# Altium PCB LPCB219R0.PcbDoc (part 2 of 2)
Units mm, origin at the board's own origin, x right, y up, seen from the top; angles counter-clockwise.
Board outline 146 x 183.7 mm, 2 copper layers (Top Layer, Bottom Layer); 93 components, 73 nets, 356 pads, 119 vias.
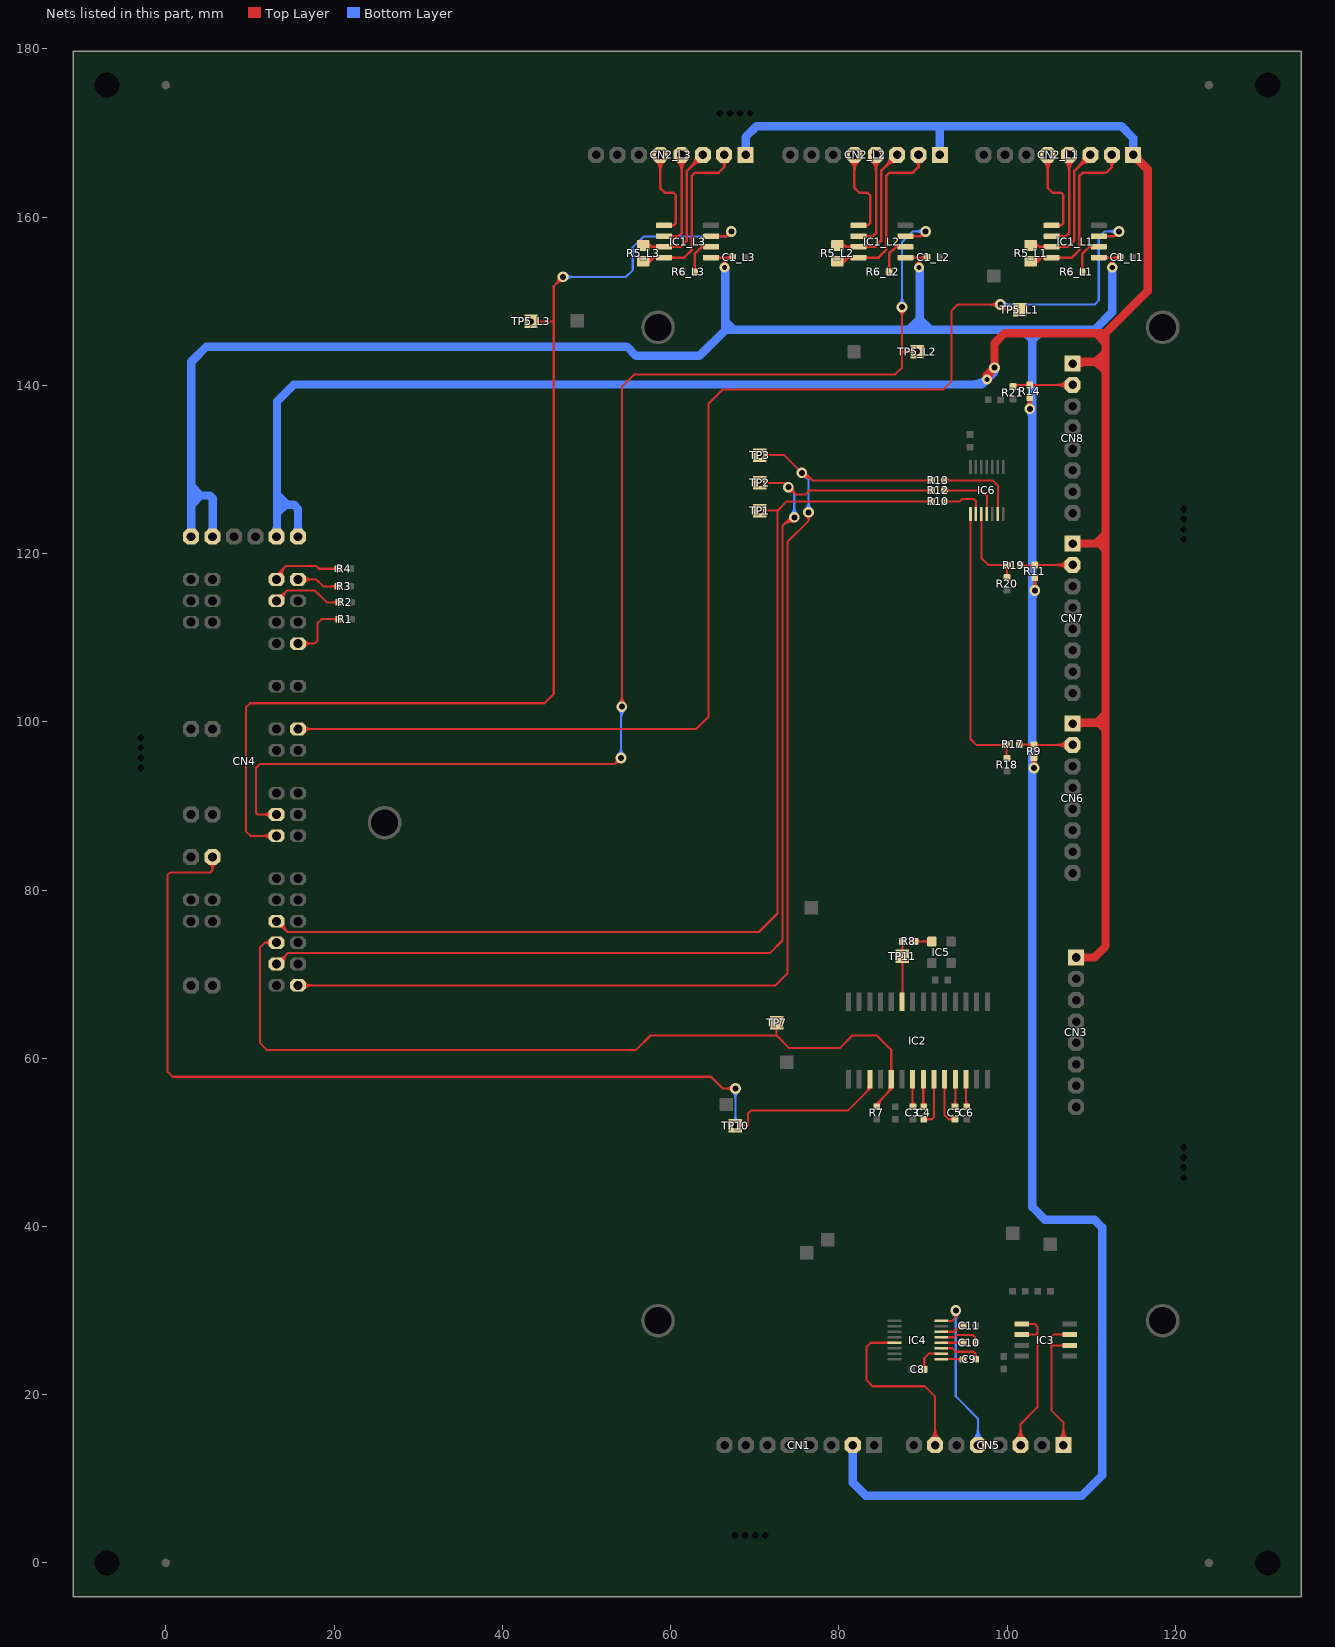
[diagram p2: the nets of this part, all layers, seen from the top]

## Via types
v1: diameter 1.27, hole 0.711, Top Layer to Bottom Layer, 68 vias
v2: diameter 1.2, hole 0.6, Top Layer to Bottom Layer, 51 vias

## Nets (pads, with @x,y where several pads share a name; then routed paths per layer and width w, separated by ;. In a path a pad name is that pad's centre, name@x,y a point inside that pad or via, vN(x,y) a via of type N, cw(c..) or ccw(c..) an arc to the next point about the centre after c; other vN are vias at no path point) (continued)
LASER_SPI_SCK: CN4.T13 IC2.17 TP10.1 | length 135.9
  Top Layer w0.254: CN4.T13@5.076,83.217 cw(c4.479,82.34) 5.54,82.34 ; CN4.T13@5.219,83.427 cw(c4.805,82.82) 5.54,82.82 cw(c6.275,82.82) CN4.T13@5.861,83.427 ; CN4.T13@5.54,83.9 5.54,82.34 ; CN4.T13@6.004,83.217 ccw(c6.601,82.34) 5.54,82.34 ; v1@67.341,56.041 ccw(c66.474,55.174) 66.474,56.4 ccw(c66.474,57.626) v1@67.341,56.759 ; v1(67.7,52) 69.2,52 69.2,53.4 69.6,53.8 81.1,53.8 83.685,56.385 ; v1(67.7,56.4) 66.2,56.4 64.8,57.8 0.8,57.8 0.2,58.4 0.2,81.8 0.5,82.1 5.3,82.1 5.54,82.34 ; TP10.1@68.059,51.641 cw(c68.926,50.774) 68.926,52 cw(c68.926,53.226) TP10.1@68.059,52.359 ; 83.174,55.874 ccw(c82.358,56.69) IC2.17@83.512,56.69 ; IC2.17@83.596,56.542 cw(c83.503,56.385) 83.685,56.385 ; 83.608,56.308 ccw(c83.225,56.69) IC2.17@83.766,56.69 ; IC2.17@83.685,57.49 83.685,56.385 ; IC2.17@83.774,56.542 ccw(c83.867,56.385) 83.685,56.385
  Bottom Layer w0.254: v1@67.341,52.359 ccw(c66.474,53.226) 67.7,53.226 ccw(c68.926,53.226) v1@68.059,52.359 ; v1@67.341,56.041 cw(c66.474,55.174) 67.7,55.174 cw(c68.926,55.174) v1@68.059,56.041 ; v1(67.7,52) v1(67.7,56.4)
LASER_TX1: CN4.T1 IC1_L1.3 TP5_L1.1 | length 169.5
  Top Layer w0.254: CN4.T1@15.7,99.14 63.04,99.14 64.5,100.6 64.5,137.8 66.2,139.5 92.4,139.5 93.4,140.5 93.4,148.9 94.1,149.6 v1(99.2,149.6) 99.8,149 TP5_L1.1@101.5,149 ; CN4.T1@16.163,98.879 cw(c16.793,98.249) 16.793,99.14 cw(c16.793,100.031) CN4.T1@16.163,99.401 ; CN4.T1@16.343,98.699 cw(c17.407,97.636) 17.407,99.14 cw(c17.407,100.644) CN4.T1@16.343,99.581 ; v1@98.841,149.241 ccw(c97.974,148.374) 97.974,149.6 ccw(c97.974,150.826) v1@98.841,149.959
  Top Layer w0.3: IC1_L1.3@110.9,157.735 112.735,157.735 ; IC1_L1.3@111.649,157.611 cw(c111.947,157.312) 111.947,157.735 cw(c111.947,158.158) IC1_L1.3@111.649,157.859 ; v1@112.837,158.154 cw(c112.441,158.029) 112.735,157.735 ; v1@113.154,157.837 ccw(c113.029,157.441) 112.735,157.735 ; v1(113.3,158.3) 112.735,157.735
  Bottom Layer w0.254: v1(99.2,149.6) 110.4,149.6 110.9,150.1 110.9,157.6 111.6,158.3 v1(113.3,158.3) ; v1@99.559,149.241 cw(c100.426,148.374) 100.426,149.6 cw(c100.426,150.826) v1@99.559,149.959 ; v1@112.941,157.941 ccw(c112.074,157.074) 112.074,158.3 ccw(c112.074,159.526) v1@112.941,158.659
LASER_TX2: CN4.T8 IC1_L2.3 TP5_L2.1 | length 171.9
  Top Layer w0.254: CN4.T8@12.517,88.539 ccw(c11.453,87.476) 11.453,88.98 ccw(c11.453,90.484) CN4.T8@12.517,89.421 ; CN4.T8@12.697,88.719 ccw(c12.067,88.089) 12.067,88.98 ccw(c12.067,89.871) CN4.T8@12.697,89.241 ; CN4.T8@13.16,88.98 10.92,88.98 10.7,89.2 10.7,94.5 11.2,95 53.4,95 ; v1@53.599,95.618 cw(c52.898,95.502) 53.4,95 ; v1@53.841,102.159 ccw(c52.974,103.026) 54.2,103.026 ccw(c55.426,103.026) v1@54.559,102.159 ; v1@54.018,95.199 ccw(c53.902,94.498) 53.4,95 ; v1(54.1,95.7) 53.4,95 ; v1(54.2,101.8) 54.2,139.8 55.7,141.3 86.7,141.3 87.5,142.1 87.5,143.9 ; v1@87.141,148.941 cw(c86.274,148.074) 87.5,148.074 cw(c88.726,148.074) v1@87.859,148.941 ; v1(87.5,149.3) 87.5,143.9 ; v1(89.3,144) 87.6,144 87.5,143.9
  Top Layer w0.3: IC1_L2.3@87.921,157.735 89.756,157.735 ; IC1_L2.3@88.669,157.611 cw(c88.968,157.312) 88.968,157.735 cw(c88.968,158.158) IC1_L2.3@88.669,157.859 ; v1@89.858,158.154 cw(c89.462,158.029) 89.756,157.735 ; v1@90.175,157.837 ccw(c90.05,157.441) 89.756,157.735 ; v1(90.321,158.3) 89.756,157.735
  Bottom Layer w0.254: v1@53.741,96.059 ccw(c52.874,96.926) 54.1,96.926 ccw(c55.326,96.926) v1@54.459,96.059 ; v1@53.841,101.441 cw(c53.215,100.815) 54.1,100.815 ; v1(54.1,95.7) 54.1,101.7 v1(54.2,101.8) ; 54.1,100.332 cw(c55.668,100.332) v1@54.559,101.441 ; 54.1,100.945 cw(c55.055,100.945) v1@54.38,101.62 ; v1@87.141,149.659 ccw(c86.274,150.526) 87.5,150.526 ccw(c88.726,150.526) v1@87.859,149.659 ; v1(87.5,149.3) 87.5,157 88.8,158.3 v1(90.321,158.3) ; v1@89.961,157.941 ccw(c89.094,157.074) 89.094,158.3 ccw(c89.094,159.526) v1@89.961,158.659
LASER_TX3: CN4.T10 IC1_L3.3 TP5_L3.1 | length 144.3
  Top Layer w0.254: CN4.T10@12.517,85.999 ccw(c11.453,84.936) 11.453,86.44 ccw(c11.453,87.944) CN4.T10@12.517,86.881 ; CN4.T10@12.697,86.179 ccw(c12.067,85.549) 12.067,86.44 ccw(c12.067,87.331) CN4.T10@12.697,86.701 ; CN4.T10@13.16,86.44 10.06,86.44 9.5,87 9.5,101.7 10,102.2 45,102.2 46.1,103.3 46.1,147.6 ; v1(43.4,147.6) 46.1,147.6 ; v1@46.692,152.9 cw(c45.466,152.9) 46.333,152.033 cw(c47.2,151.166) v1@47.2,152.392 ; v1(47.2,152.9) 46.1,151.8 46.1,147.6
  Top Layer w0.3: IC1_L3.3@64.821,157.735 66.656,157.735 ; IC1_L3.3@65.569,157.611 cw(c65.868,157.312) 65.868,157.735 cw(c65.868,158.158) IC1_L3.3@65.569,157.859 ; v1@66.758,158.154 cw(c66.362,158.029) 66.656,157.735 ; v1@67.075,157.837 ccw(c66.95,157.441) 66.656,157.735 ; v1(67.221,158.3) 66.656,157.735
  Bottom Layer w0.254: v1(47.2,152.9) 54.7,152.9 55.5,153.7 55.5,156.4 56.8,157.7 66.621,157.7 v1(67.221,158.3) ; v1@47.559,152.541 cw(c48.426,151.674) 48.426,152.9 cw(c48.426,154.126) v1@47.559,153.259
MID_SIG_Q2: IC6.3 R19.2 R20.2 | length 10.2
  Top Layer w0.254: IC6.3@96.95,124.725 96.95,119.45 97.75,118.65 100,118.65 R19.2@100.05,118.6 100,118.55 R20.2@100,117.15
NetC3_2: C3.2 IC2.21 | length 5
  Top Layer w0.254: C3.2@88.607,54.433 ccw(c88.225,54.815) 88.765,54.815 ; IC2.21@88.643,56.568 cw(c88.347,56.272) 88.765,56.272 cw(c89.183,56.272) IC2.21@88.887,56.568 ; 88.765,54.984 ccw(c89.544,54.984) C3.2@88.993,54.433 ; IC2.21@88.765,57.49 88.765,54.275 C3.2@88.8,54.24
NetC4_1: C4.1 IC2.23 | length 7.5
  Top Layer w0.254: C4.1@90.1,52.74 91.05,52.74 91.305,52.995 IC2.23@91.305,57.49 ; C4.1@90.293,52.547 cw(c90.759,52.081) 90.759,52.74 cw(c90.759,53.399) C4.1@90.293,52.933 ; IC2.23@91.183,56.568 cw(c90.887,56.272) 91.305,56.272 cw(c91.723,56.272) IC2.23@91.427,56.568
NetC4_2: C4.2 IC2.22 | length 5
  Top Layer w0.254: C4.2@89.907,54.433 ccw(c89.598,54.742) 90.035,54.742 ; IC2.22@89.913,56.568 cw(c89.617,56.272) 90.035,56.272 cw(c90.453,56.272) IC2.22@90.157,56.568 ; 90.035,55.056 ccw(c90.916,55.056) C4.2@90.293,54.433 ; IC2.22@90.035,57.49 90.035,54.305 C4.2@90.1,54.24
NetC5_1: C5.1 IC2.25 | length 5
  Top Layer w0.254: C5.1@93.607,54.433 ccw(c93.032,55.008) 93.845,55.008 ; IC2.25@93.723,56.568 cw(c93.427,56.272) 93.845,56.272 cw(c94.263,56.272) IC2.25@93.967,56.568 ; C5.1@93.8,54.24 93.845,54.285 IC2.25@93.845,57.49 ; 93.845,54.79 ccw(c94.35,54.79) C5.1@93.993,54.433
NetC5_2: C5.2 IC2.24 | length 7.4
  Top Layer w0.254: IC2.24@92.453,56.568 cw(c92.157,56.272) 92.575,56.272 cw(c92.993,56.272) IC2.24@92.697,56.568 ; IC2.24@92.575,57.49 92.575,53.215 93.05,52.74 C5.2@93.8,52.74 ; C5.2@93.607,52.547 ccw(c93.141,52.081) 93.141,52.74 ccw(c93.141,53.399) C5.2@93.607,52.933
NetC6_1: C6.1 IC2.26 | length 5
  Top Layer w0.254: IC2.26@94.993,56.568 cw(c94.697,56.272) 95.115,56.272 cw(c95.533,56.272) IC2.26@95.237,56.568 ; C6.1@95.007,54.433 ccw(c94.746,54.694) 95.115,54.694 ; 95.115,55.104 ccw(c96.064,55.104) C6.1@95.393,54.433 ; IC2.26@95.115,57.49 95.115,54.325 C6.1@95.2,54.24
NetC8_2: C8.2 IC4.2 | length 4.6
  Top Layer w0.254: C8.2@89.957,23.193 ccw(c89.491,23.659) 90.15,23.659 ccw(c90.809,23.659) C8.2@90.343,23.193 ; C8.2@90.15,23 90.15,24.35 90.675,24.875 IC4.2@92.175,24.875
NetC9_1: C9.1 IC4.1 | length 3.6
  Top Layer w0.254: IC4.1@92.175,24.225 94.725,24.225 C9.1@94.75,24.2 ; 94.031,24.225 cw(c94.031,23.481) C9.1@94.557,24.007 ; 94.151,24.225 ccw(c94.151,24.799) C9.1@94.557,24.393
NetC9_2: C9.2 IC4.3 | length 6
  Top Layer w0.254: IC4.3@92.175,25.525 93.475,25.525 93.9,25.1 96,25.1 96.25,24.85 ; C9.2@96.059,24.395 ccw(c95.613,24.85) 96.25,24.85 ; C9.2@96.25,24.2 96.25,24.85 ; C9.2@96.441,24.395 cw(c96.887,24.85) 96.25,24.85
NetC10_1: C10.1 IC4.4 | length 3.6
  Top Layer w0.254: IC4.4@92.175,26.175 94.725,26.175 C10.1@94.75,26.2 ; 94.031,26.175 ccw(c94.031,26.919) C10.1@94.557,26.393 ; 94.151,26.175 cw(c94.151,25.601) C10.1@94.557,26.007
NetC10_2: C10.2 IC4.5 | length 5.7
  Top Layer w0.254: IC4.5@92.175,26.825 93.725,26.825 94,27.1 95.9,27.1 96.25,26.75 ; C10.2@96.085,26.417 ccw(c95.833,26.75) 96.25,26.75 ; C10.2@96.25,26.2 96.25,26.75 ; C10.2@96.415,26.417 cw(c96.667,26.75) 96.25,26.75
NetC11_1: C11.1 IC4.6 | length 4.8
  Top Layer w0.254: IC4.6@92.175,27.475 93.675,27.475 94.4,28.2 C11.1@94.75,28.2 ; 93.686,27.486 cw(c94.75,26.423) C11.1@94.75,27.927 ; 94.12,27.92 cw(c94.75,27.29) C11.1@94.75,28.181
NetCN2_L1_2: CN2_L1.2 IC1_L1.8 R5_L1.1 | length 27.5
  Top Layer w0.3: R5_L1.1@102.8,154.75 103.65,154.75 ; R5_L1.1@102.838,154.671 ccw(c103.202,155.133) 103.617,154.717 ; R5_L1.1@103.024,154.907 ccw(c103.412,155.4) 103.856,154.956 ; R5_L1.1@103.209,155.143 ccw(c103.623,155.667) 104.095,155.195 ; R5_L1.1@103.362,154.558 cw(c103.65,154.438) 103.65,154.75 ; R5_L1.1@103.362,154.942 ccw(c103.65,155.062) 103.65,154.75 ; IC1_L1.8@104.551,155.071 ccw(c104.253,154.772) 104.253,155.195 ccw(c104.253,155.618) IC1_L1.8@104.551,155.319 ; IC1_L1.8@106.049,155.071 cw(c106.347,154.772) 106.347,155.195 cw(c106.347,155.618) IC1_L1.8@106.049,155.319 ; CN2_L1.2@112.024,166.72 cw(c111.541,165.95) 112.45,165.95 cw(c113.359,165.95) CN2_L1.2@112.876,166.72 ; CN2_L1.2@112.45,167.4 112.45,165.95 111.8,165.3 109,165.3 108.6,164.9 108.6,156.1 107.695,155.195 IC1_L1.8@105.3,155.195 104.095,155.195 ; 103.65,154.75 104.095,155.195
NetCN2_L1_3: CN2_L1.3 IC1_L1.7 R5_L1.2 | length 23.6
  Top Layer w0.3: R5_L1.2@102.8,156.65 103.65,156.65 ; R5_L1.2@103.362,156.458 cw(c103.65,156.338) 103.65,156.65 ; R5_L1.2@103.362,156.842 ccw(c103.65,156.962) 103.65,156.65 ; IC1_L1.7@104.551,156.341 ccw(c104.253,156.042) 104.253,156.465 ccw(c104.253,156.888) IC1_L1.7@104.551,156.589 ; IC1_L1.7@106.049,156.341 cw(c106.347,156.042) 106.347,156.465 cw(c106.347,156.888) IC1_L1.7@106.049,156.589 ; CN2_L1.3@109.108,167.4 cw(c107.17,167.4) 108.54,166.03 cw(c109.91,164.66) CN2_L1.3@109.91,166.598 ; CN2_L1.3@109.408,167.4 cw(c108.194,167.4) 109.052,166.542 cw(c109.91,165.684) CN2_L1.3@109.91,166.897 ; CN2_L1.3@109.91,167.4 108,165.49 108,157.2 107.265,156.465 IC1_L1.7@105.3,156.465 103.835,156.465 103.65,156.65
NetCN2_L1_4: CN2_L1.4 IC1_L1.6 | length 17.2
  Top Layer w0.3: IC1_L1.6@105.3,157.735 107.035,157.735 107.4,158.1 107.4,167.37 CN2_L1.4@107.37,167.4 ; IC1_L1.6@106.049,157.611 cw(c106.347,157.312) 106.347,157.735 cw(c106.347,158.158) IC1_L1.6@106.049,157.859 ; CN2_L1.4@106.803,166.833 cw(c105.36,165.39) 107.4,165.39 ; CN2_L1.4@107.015,167.045 cw(c106.084,166.114) 107.4,166.114 ; 107.4,165.535 cw(c109.235,165.535) CN2_L1.4@107.937,166.833 ; 107.4,166.259 cw(c108.511,166.259) CN2_L1.4@107.725,167.045
NetCN2_L1_5: CN2_L1.5 IC1_L1.5 | length 16.6
  Top Layer w0.3: CN2_L1.5@104.263,166.833 cw(c102.893,165.463) 104.83,165.463 cw(c106.767,165.463) CN2_L1.5@105.397,166.833 ; CN2_L1.5@104.475,167.045 cw(c103.617,166.187) 104.83,166.187 cw(c106.043,166.187) CN2_L1.5@105.185,167.045 ; CN2_L1.5@104.83,167.4 104.83,163.47 105.4,162.9 106.4,162.9 106.7,162.6 106.7,159.3 106.405,159.005 IC1_L1.5@105.3,159.005 ; IC1_L1.5@106.049,158.881 cw(c106.347,158.582) 106.347,159.005 cw(c106.347,159.428) IC1_L1.5@106.049,159.129
NetCN2_L2_2: CN2_L2.2 IC1_L2.8 R5_L2.1 | length 27.5
  Top Layer w0.3: R5_L2.1@79.821,154.75 80.671,154.75 ; R5_L2.1@79.859,154.671 ccw(c80.222,155.133) 80.638,154.717 ; R5_L2.1@80.044,154.907 ccw(c80.433,155.4) 80.877,154.956 ; R5_L2.1@80.23,155.143 ccw(c80.643,155.667) 81.116,155.195 ; R5_L2.1@80.382,154.558 cw(c80.671,154.438) 80.671,154.75 ; R5_L2.1@80.382,154.942 ccw(c80.671,155.062) 80.671,154.75 ; IC1_L2.8@81.572,155.071 ccw(c81.273,154.772) 81.273,155.195 ccw(c81.273,155.618) IC1_L2.8@81.572,155.319 ; IC1_L2.8@83.069,155.071 cw(c83.368,154.772) 83.368,155.195 cw(c83.368,155.618) IC1_L2.8@83.069,155.319 ; CN2_L2.2@89.044,166.72 cw(c88.562,165.95) 89.471,165.95 cw(c90.379,165.95) CN2_L2.2@89.897,166.72 ; CN2_L2.2@89.471,167.4 89.471,165.95 88.821,165.3 86.021,165.3 85.621,164.9 85.621,156.1 84.716,155.195 IC1_L2.8@82.321,155.195 81.116,155.195 ; 80.671,154.75 81.116,155.195
NetCN2_L2_3: CN2_L2.3 IC1_L2.7 R5_L2.2 | length 23.6
  Top Layer w0.3: R5_L2.2@79.821,156.65 80.671,156.65 ; R5_L2.2@80.382,156.458 cw(c80.671,156.338) 80.671,156.65 ; R5_L2.2@80.382,156.842 ccw(c80.671,156.962) 80.671,156.65 ; IC1_L2.7@81.572,156.341 ccw(c81.273,156.042) 81.273,156.465 ccw(c81.273,156.888) IC1_L2.7@81.572,156.589 ; IC1_L2.7@83.069,156.341 cw(c83.368,156.042) 83.368,156.465 cw(c83.368,156.888) IC1_L2.7@83.069,156.589 ; CN2_L2.3@86.128,167.4 cw(c84.191,167.4) 85.561,166.03 cw(c86.931,164.66) CN2_L2.3@86.931,166.598 ; CN2_L2.3@86.428,167.4 cw(c85.215,167.4) 86.073,166.542 cw(c86.931,165.684) CN2_L2.3@86.931,166.897 ; CN2_L2.3@86.931,167.4 85.021,165.49 85.021,157.2 84.286,156.465 IC1_L2.7@82.321,156.465 80.856,156.465 80.671,156.65
NetCN2_L2_4: CN2_L2.4 IC1_L2.6 | length 17.2
  Top Layer w0.3: IC1_L2.6@82.321,157.735 84.056,157.735 84.421,158.1 84.421,167.37 CN2_L2.4@84.391,167.4 ; IC1_L2.6@83.069,157.611 cw(c83.368,157.312) 83.368,157.735 cw(c83.368,158.158) IC1_L2.6@83.069,157.859 ; CN2_L2.4@83.823,166.833 cw(c82.381,165.39) 84.421,165.39 ; CN2_L2.4@84.035,167.045 cw(c83.105,166.114) 84.421,166.114 ; 84.421,165.535 cw(c86.256,165.535) CN2_L2.4@84.958,166.833 ; 84.421,166.259 cw(c85.531,166.259) CN2_L2.4@84.746,167.045
NetCN2_L2_5: CN2_L2.5 IC1_L2.5 | length 16.6
  Top Layer w0.3: CN2_L2.5@81.283,166.833 cw(c79.913,165.463) 81.851,165.463 cw(c83.788,165.463) CN2_L2.5@82.418,166.833 ; CN2_L2.5@81.495,167.045 cw(c80.637,166.187) 81.851,166.187 cw(c83.064,166.187) CN2_L2.5@82.206,167.045 ; CN2_L2.5@81.851,167.4 81.851,163.47 82.421,162.9 83.421,162.9 83.721,162.6 83.721,159.3 83.426,159.005 IC1_L2.5@82.321,159.005 ; IC1_L2.5@83.069,158.881 cw(c83.368,158.582) 83.368,159.005 cw(c83.368,159.428) IC1_L2.5@83.069,159.129
NetCN2_L3_2: CN2_L3.2 IC1_L3.8 R5_L3.1 | length 27.5
  Top Layer w0.3: R5_L3.1@56.721,154.75 57.571,154.75 ; R5_L3.1@56.759,154.671 ccw(c57.122,155.133) 57.538,154.717 ; R5_L3.1@56.944,154.907 ccw(c57.333,155.4) 57.777,154.956 ; R5_L3.1@57.13,155.143 ccw(c57.543,155.667) 58.016,155.195 ; R5_L3.1@57.282,154.558 cw(c57.571,154.438) 57.571,154.75 ; R5_L3.1@57.282,154.942 ccw(c57.571,155.062) 57.571,154.75 ; IC1_L3.8@58.472,155.071 ccw(c58.173,154.772) 58.173,155.195 ccw(c58.173,155.618) IC1_L3.8@58.472,155.319 ; IC1_L3.8@59.969,155.071 cw(c60.268,154.772) 60.268,155.195 cw(c60.268,155.618) IC1_L3.8@59.969,155.319 ; CN2_L3.2@65.944,166.72 cw(c65.462,165.95) 66.371,165.95 cw(c67.279,165.95) CN2_L3.2@66.797,166.72 ; CN2_L3.2@66.371,167.4 66.371,165.95 65.721,165.3 62.921,165.3 62.521,164.9 62.521,156.1 61.616,155.195 IC1_L3.8@59.221,155.195 58.016,155.195 ; 57.571,154.75 58.016,155.195
NetCN2_L3_3: CN2_L3.3 IC1_L3.7 R5_L3.2 | length 23.6
  Top Layer w0.3: R5_L3.2@56.721,156.65 57.571,156.65 ; R5_L3.2@57.282,156.458 cw(c57.571,156.338) 57.571,156.65 ; R5_L3.2@57.282,156.842 ccw(c57.571,156.962) 57.571,156.65 ; IC1_L3.7@58.472,156.341 ccw(c58.173,156.042) 58.173,156.465 ccw(c58.173,156.888) IC1_L3.7@58.472,156.589 ; IC1_L3.7@59.969,156.341 cw(c60.268,156.042) 60.268,156.465 cw(c60.268,156.888) IC1_L3.7@59.969,156.589 ; CN2_L3.3@63.028,167.4 cw(c61.091,167.4) 62.461,166.03 cw(c63.831,164.66) CN2_L3.3@63.831,166.598 ; CN2_L3.3@63.328,167.4 cw(c62.115,167.4) 62.973,166.542 cw(c63.831,165.684) CN2_L3.3@63.831,166.897 ; CN2_L3.3@63.831,167.4 61.921,165.49 61.921,157.2 61.186,156.465 IC1_L3.7@59.221,156.465 57.756,156.465 57.571,156.65
NetCN2_L3_4: CN2_L3.4 IC1_L3.6 | length 17.2
  Top Layer w0.3: IC1_L3.6@59.221,157.735 60.956,157.735 61.321,158.1 61.321,167.37 CN2_L3.4@61.291,167.4 ; IC1_L3.6@59.969,157.611 cw(c60.268,157.312) 60.268,157.735 cw(c60.268,158.158) IC1_L3.6@59.969,157.859 ; CN2_L3.4@60.723,166.833 cw(c59.281,165.39) 61.321,165.39 ; CN2_L3.4@60.935,167.045 cw(c60.005,166.114) 61.321,166.114 ; 61.321,165.535 cw(c63.156,165.535) CN2_L3.4@61.858,166.833 ; 61.321,166.259 cw(c62.431,166.259) CN2_L3.4@61.646,167.045
NetCN2_L3_5: CN2_L3.5 IC1_L3.5 | length 16.6
  Top Layer w0.3: CN2_L3.5@58.183,166.833 cw(c56.813,165.463) 58.751,165.463 cw(c60.688,165.463) CN2_L3.5@59.318,166.833 ; CN2_L3.5@58.395,167.045 cw(c57.537,166.187) 58.751,166.187 cw(c59.964,166.187) CN2_L3.5@59.106,167.045 ; CN2_L3.5@58.751,167.4 58.751,163.47 59.321,162.9 60.321,162.9 60.621,162.6 60.621,159.3 60.326,159.005 IC1_L3.5@59.221,159.005 ; IC1_L3.5@59.969,158.881 cw(c60.268,158.582) 60.268,159.005 cw(c60.268,159.428) IC1_L3.5@59.969,159.129
NetCN4_ID1: CN4.ID1 R4.1 | length 14.1
  Top Layer w0.254: CN4.ID1@13.16,116.92 13.16,117.46 14.2,118.5 ; CN4.ID1@13.234,116.866 cw(c13.935,117.16) 13.398,117.698 ; CN4.ID1@13.469,116.965 cw(c14.312,117.318) 13.665,117.965 ; CN4.ID1@13.703,117.063 cw(c14.688,117.477) 13.933,118.233 ; CN4.ID1@13.937,117.161 cw(c15.065,117.635) 14.2,118.5 ; R4.1@20.257,118.007 ccw(c19.791,117.541) 19.791,118.2 ccw(c19.791,118.859) R4.1@20.257,118.393 ; R4.1@20.45,118.2 18.2,118.2 17.9,118.5 14.2,118.5
NetCN4_ID2: CN4.ID2 R3.1 | length 9.9
  Top Layer w0.254: CN4.ID2@15.7,116.92 17.88,116.92 18.7,116.1 R3.1@20.45,116.1 ; CN4.ID2@16.163,116.659 cw(c16.793,116.029) 16.793,116.92 cw(c16.793,117.811) CN4.ID2@16.163,117.181 ; CN4.ID2@16.343,116.479 cw(c17.407,115.416) 17.407,116.92 cw(c17.407,118.424) CN4.ID2@16.343,117.361 ; R3.1@20.257,115.907 ccw(c19.791,115.441) 19.791,116.1 ccw(c19.791,116.759) R3.1@20.257,116.293
NetCN4_ID3: CN4.ID3 R2.1 | length 12.2
  Top Layer w0.254: CN4.ID3@13.16,114.38 14.3,115.52 ; CN4.ID3@13.363,115.003 ccw(c13.363,116.018) 14.08,115.3 ; CN4.ID3@13.726,114.445 cw(c14.541,114.59) 13.956,115.176 ; CN4.ID3@13.976,114.489 cw(c15.126,114.694) 14.3,115.52 ; R2.1@20.357,114.007 ccw(c19.891,113.541) 19.891,114.2 ccw(c19.891,114.859) R2.1@20.357,114.393 ; R2.1@20.55,114.2 19.1,114.2 17.7,115.6 14.4,115.6 14.32,115.52 14.3,115.52
NetCN4_ID4: CN4.ID4 R1.1 | length 12.1
  Top Layer w0.254: CN4.ID4@15.7,109.3 17.7,109.3 18,109.6 18,111.7 18.5,112.2 R1.1@20.55,112.2 ; CN4.ID4@16.163,109.039 cw(c16.793,108.409) 16.793,109.3 cw(c16.793,110.191) CN4.ID4@16.163,109.561 ; CN4.ID4@16.343,108.859 cw(c17.407,107.796) 17.407,109.3 cw(c17.407,110.804) CN4.ID4@16.343,109.741 ; R1.1@20.357,112.007 ccw(c19.891,111.541) 19.891,112.2 ccw(c19.891,112.859) R1.1@20.357,112.393
NetCN4_T20: CN4.T20 R10.1 TP1.1 | length 133.9
  Top Layer w0.254: CN4.T20@13.16,76.28 14.44,75 ; CN4.T20@13.363,75.657 cw(c13.363,74.642) 14.08,75.36 ; CN4.T20@13.73,76.252 ccw(c14.826,76.168) 14.049,75.391 ; CN4.T20@13.984,76.233 ccw(c15.552,76.113) 14.44,75 ; v1(70.6,125.1) 72.7,125.1 ; R10.1@90.857,126.007 ccw(c90.391,125.541) 90.391,126.2 ccw(c90.391,126.859) R10.1@90.857,126.393 ; R10.1@91.05,126.2 73.8,126.2 72.7,125.1 ; 14.44,75 70.5,75 72.7,77.2 72.7,125.1
NetCN4_T22: CN4.T22 IC2.19 R7.1 TP7.1 | length 107.2
  Top Layer w0.254: CN4.T22@12.452,73.376 ccw(c11.74,72.862) 11.74,73.74 ; CN4.T22@12.452,74.104 cw(c11.74,74.618) 11.74,73.74 ; CN4.T22@13.16,73.74 11.74,73.74 ; TP7.1@72.6,64.2 72.6,62.7 ; 81.9,62.7 81.6,62.7 ; R7.1@84.5,54.24 84.5,54.59 86.225,56.315 ; R7.1@84.519,54.24 cw(c85.41,54.24) 84.78,54.87 ; R7.1@84.773,54.24 cw(c86.277,54.24) 85.214,55.304 ; 85.665,55.755 ccw(c84.729,56.69) IC2.19@86.052,56.69 ; 86.098,56.188 ccw(c85.596,56.69) IC2.19@86.306,56.69 ; IC2.19@86.103,58.412 ccw(c85.807,58.708) 86.225,58.708 ccw(c86.643,58.708) IC2.19@86.347,58.412 ; IC2.19@86.113,56.558 cw(c85.905,56.315) 86.225,56.315 ; IC2.19@86.337,56.558 ccw(c86.545,56.315) 86.225,56.315 ; 11.74,73.74 11.2,73.2 11.2,61.8 12,61 55.9,61 57.6,62.7 72.6,62.7 ; 72.6,62.7 74.1,61.2 80.1,61.2 81.6,62.7 ; 81.6,62.7 84.5,62.7 86.225,60.975 IC2.19@86.225,57.49 86.225,56.315
NetCN4_T24: CN4.T24 R12.1 TP2.1 | length 150.2
  Top Layer w0.254: CN4.T24@13.16,71.2 14.46,72.5 ; CN4.T24@13.363,71.823 ccw(c13.363,72.838) 14.08,72.12 ; CN4.T24@13.731,71.223 cw(c14.869,71.296) 14.063,72.103 ; CN4.T24@13.984,71.24 cw(c15.616,71.344) 14.46,72.5 ; v1(70.6,128.4) 73.5,128.4 v1(74,127.9) 74.9,127 76,127 76.5,127.5 R12.1@91.05,127.5 ; 73.685,123.685 cw(c74.57,122.801) v1@74.678,124.047 ; v1@74,127.392 cw(c74,126.166) 74.867,127.033 cw(c75.734,127.9) v1@74.508,127.9 ; 74.071,124.071 cw(c74.631,123.51) v1(74.7,124.3) 74.3,124.3 73.3,123.3 ; v1@74.656,123.794 ccw(c74.508,122.092) 73.3,123.3 ; R12.1@90.857,127.307 ccw(c90.391,126.841) 90.391,127.5 ccw(c90.391,128.159) R12.1@90.857,127.693 ; 14.46,72.5 71.8,72.5 73.3,74 73.3,123.3
  Bottom Layer w0.254: v1(74,127.9) 74.7,127.2 ; v1@74.082,127.399 cw(c74.198,126.698) 74.7,127.2 ; v1@74.341,124.659 ccw(c73.474,125.526) 74.7,125.526 ccw(c75.926,125.526) v1@75.059,124.659 ; v1@74.501,127.818 ccw(c75.202,127.702) 74.7,127.2 ; v1(74.7,124.3) 74.7,127.2
NetCN4_T27: CN4.T27 R13.1 TP3.1 | length 153.5
  Top Layer w0.254: CN4.T27@15.7,68.66 72.46,68.66 73.9,70.1 73.9,121.4 76.4,123.9 ; CN4.T27@16.163,68.399 cw(c16.793,67.769) 16.793,68.66 cw(c16.793,69.551) CN4.T27@16.163,68.921 ; CN4.T27@16.343,68.219 cw(c17.407,67.156) 17.407,68.66 cw(c17.407,70.164) CN4.T27@16.343,69.101 ; v1(70.6,131.7) 73.5,131.7 v1(75.6,129.6) 76,129.6 76.9,128.7 ; v1@75.639,129.349 cw(c75.802,128.309) 76.547,129.053 ; v1@75.679,129.098 cw(c75.898,127.698) 76.9,128.7 ; v1@76.1,124.49 cw(c75.67,123.9) 76.4,123.9 ; v1(76.4,124.9) 76.4,123.9 ; v1@76.7,124.49 ccw(c77.13,123.9) 76.4,123.9 ; R13.1@90.857,128.507 ccw(c90.391,128.041) 90.391,128.7 ccw(c90.391,129.359) R13.1@90.857,128.893 ; R13.1@91.05,128.7 76.9,128.7
  Bottom Layer w0.254: v1(75.6,129.6) 76.4,128.8 v1(76.4,124.9) ; v1@75.63,129.093 cw(c75.689,128.089) 76.4,128.8 cw(c77.111,129.511) v1@76.107,129.57 ; v1@76.041,125.259 ccw(c75.174,126.126) 76.4,126.126 ccw(c77.626,126.126) v1@76.759,125.259
NetCN6_2: CN6.2 R9.1 R17.1 | length 13.1
  Top Layer w0.254: R17.1@101.45,97.3 102.491,97.3 102.541,97.25 ; R9.1@103.007,97.057 ccw(c102.541,96.591) 102.541,97.25 ; R9.1@103.007,97.443 cw(c102.541,97.909) 102.541,97.25 ; R9.1@103.2,97.25 CN6.2@107.8,97.25 ; R9.1@103.393,97.057 cw(c103.859,96.591) 103.859,97.25 cw(c103.859,97.909) R9.1@103.393,97.443 ; CN6.2@107.216,96.666 ccw(c105.807,95.257) 105.807,97.25 ccw(c105.807,99.243) CN6.2@107.216,97.834 ; CN6.2@107.396,96.846 ccw(c106.42,95.87) 106.42,97.25 ccw(c106.42,98.63) CN6.2@107.396,97.654
NetCN7_2: CN7.2 R11.1 R19.1 | length 12.6
  Top Layer w0.254: R19.1@101.55,118.6 103.25,118.6 R11.1@103.3,118.65 CN7.2@107.8,118.65 ; R11.1@103.493,118.457 cw(c103.959,117.991) 103.959,118.65 cw(c103.959,119.309) R11.1@103.493,118.843 ; CN7.2@107.216,118.066 ccw(c105.807,116.657) 105.807,118.65 ccw(c105.807,120.643) CN7.2@107.216,119.234 ; CN7.2@107.396,118.246 ccw(c106.42,117.27) 106.42,118.65 ccw(c106.42,120.03) CN7.2@107.396,119.054
NetCN8_2: CN8.2 R14.1 R21.1 | length 14.4
  Top Layer w0.254: R21.1@100.9,139.8 101.15,140.05 R14.1@102.7,140.05 CN8.2@107.8,140.05 ; R14.1@102.507,139.857 ccw(c102.041,139.391) 102.041,140.05 ccw(c102.041,140.709) R14.1@102.507,140.243 ; R14.1@102.893,139.857 cw(c103.359,139.391) 103.359,140.05 cw(c103.359,140.709) R14.1@102.893,140.243 ; CN8.2@107.216,139.466 ccw(c105.807,138.057) 105.807,140.05 ccw(c105.807,142.043) CN8.2@107.216,140.634 ; CN8.2@107.396,139.646 ccw(c106.42,138.67) 106.42,140.05 ccw(c106.42,141.43) CN8.2@107.396,140.454
NetIC1_L1_2: IC1_L1.2 R6_L1.2 | length 6
  Top Layer w0.3: R6_L1.2@108.773,153.677 ccw(c108.346,154.104) 108.95,154.104 ccw(c109.554,154.104) R6_L1.2@109.127,153.677 ; R6_L1.2@108.95,153.5 108.95,155.65 109.765,156.465 IC1_L1.2@110.9,156.465 ; IC1_L1.2@110.151,156.341 ccw(c109.853,156.042) 109.853,156.465 ccw(c109.853,156.888) IC1_L1.2@110.151,156.589
NetIC1_L2_2: IC1_L2.2 R6_L2.2 | length 6
  Top Layer w0.3: R6_L2.2@85.794,153.677 ccw(c85.367,154.104) 85.971,154.104 ccw(c86.574,154.104) R6_L2.2@86.147,153.677 ; R6_L2.2@85.971,153.5 85.971,155.65 86.786,156.465 IC1_L2.2@87.921,156.465 ; IC1_L2.2@87.172,156.341 ccw(c86.873,156.042) 86.873,156.465 ccw(c86.873,156.888) IC1_L2.2@87.172,156.589
NetIC1_L3_2: IC1_L3.2 R6_L3.2 | length 6
  Top Layer w0.3: R6_L3.2@62.694,153.677 ccw(c62.267,154.104) 62.871,154.104 ccw(c63.474,154.104) R6_L3.2@63.047,153.677 ; R6_L3.2@62.871,153.5 62.871,155.65 63.686,156.465 IC1_L3.2@64.821,156.465 ; IC1_L3.2@64.072,156.341 ccw(c63.773,156.042) 63.773,156.465 ccw(c63.773,156.888) IC1_L3.2@64.072,156.589
NetIC2_9: IC2.9 R8.2 TP11.1 | length 8.7
  Top Layer w0.254: R8.2@87.357,73.697 cw(c86.891,73.231) 87.55,73.231 cw(c88.209,73.231) R8.2@87.743,73.697 ; IC2.9@87.373,67.612 ccw(c86.945,68.04) 87.55,68.04 ; IC2.9@87.495,66.69 87.55,66.745 R8.2@87.55,73.89
NetIC5_3: IC5.3 R8.1 | length 4.7
  Top Layer w0.254: R8.1@89.05,73.89 91.02,73.89 IC5.3@91.05,73.86 ; R8.1@89.243,73.697 cw(c89.709,73.231) 89.709,73.89 cw(c89.709,74.549) R8.1@89.243,74.083 ; 89.981,73.89 ccw(c89.981,74.979) IC5.3@90.751,74.209 ; 90.077,73.89 cw(c90.077,72.937) IC5.3@90.751,73.611
NetIC6_2: IC6.2 R10.2 | length 6.5
  Top Layer w0.254: R10.2@92.55,126.2 94.4,126.2 94.7,126.5 96,126.5 96.3,126.2 IC6.2@96.3,124.725 ; R10.2@92.743,126.007 cw(c93.209,125.541) 93.209,126.2 cw(c93.209,126.859) R10.2@92.743,126.393
NetIC6_4: IC6.4 R12.2 | length 8.5
  Top Layer w0.254: R12.2@92.55,127.5 97,127.5 97.6,126.9 IC6.4@97.6,124.725 ; R12.2@92.743,127.307 cw(c93.209,126.841) 93.209,127.5 cw(c93.209,128.159) R12.2@92.743,127.693
NetIC6_6: IC6.6 R13.2 | length 11
  Top Layer w0.254: R13.2@92.55,128.7 98.3,128.7 98.9,128.1 IC6.6@98.9,124.725 ; R13.2@92.743,128.507 cw(c93.209,128.041) 93.209,128.7 cw(c93.209,129.359) R13.2@92.743,128.893
P5VA: C1_L1.1 C1_L2.1 C1_L3.1 CN1.2 CN4.P5V1 CN4.P5V2 IC1_L1.1 IC1_L2.1 IC1_L3.1 R9.2 R11.2 R14.2 | length 397.4
  Top Layer w0.254: v1@102.341,137.559 ccw(c101.474,138.426) 102.7,138.426 ccw(c103.926,138.426) v1@103.059,137.559 ; R14.2@102.507,138.357 cw(c102.041,137.891) 102.7,137.891 cw(c103.359,137.891) R14.2@102.893,138.357 ; v1(102.7,137.2) R14.2@102.7,138.55 ; v1@102.841,94.859 ccw(c101.974,95.726) 103.2,95.726 ccw(c104.426,95.726) v1@103.559,94.859 ; v1@102.941,115.959 ccw(c102.074,116.826) 103.3,116.826 ccw(c104.526,116.826) v1@103.659,115.959 ; R9.2@103.007,95.557 cw(c102.541,95.091) 103.2,95.091 cw(c103.859,95.091) R9.2@103.393,95.557 ; v1@103.047,94.985 ccw(c102.969,95.232) 103.22,95.165 ; R11.2@103.107,116.957 cw(c102.641,116.491) 103.3,116.491 cw(c103.959,116.491) R11.2@103.493,116.957 ; 103.18,95.165 ccw(c103.431,95.232) v1@103.353,94.985 ; v1(103.2,94.5) R9.2@103.2,95.75 ; v1(103.3,115.6) R11.2@103.3,117.15
  Top Layer w0.3: IC1_L3.1@64.821,155.195 66.321,155.195 ; IC1_L3.1@65.569,155.071 cw(c65.868,154.772) 65.868,155.195 cw(c65.868,155.618) IC1_L3.1@65.569,155.319 ; v2@66.102,154.318 ccw(c65.334,155.086) 66.421,155.086 ccw(c67.507,155.086) v2@66.739,154.318 ; v2(66.421,154) 66.421,155.095 66.321,155.195 ; 66.755,155.195 ccw(c66.755,155.816) C1_L3.1@67.194,155.377 ; 66.779,155.195 cw(c66.779,154.609) C1_L3.1@67.194,155.023 ; C1_L3.1@67.371,155.2 67.366,155.195 66.321,155.195 ; IC1_L2.1@87.921,155.195 89.421,155.195 ; IC1_L2.1@88.669,155.071 cw(c88.968,154.772) 88.968,155.195 cw(c88.968,155.618) IC1_L2.1@88.669,155.319 ; v2@89.202,154.318 ccw(c88.434,155.086) 89.521,155.086 ccw(c90.607,155.086) v2@89.839,154.318 ; v2(89.521,154) 89.521,155.095 89.421,155.195 ; 89.855,155.195 ccw(c89.855,155.816) C1_L2.1@90.294,155.377 ; 89.879,155.195 cw(c89.879,154.609) C1_L2.1@90.294,155.023 ; C1_L2.1@90.471,155.2 90.466,155.195 89.421,155.195 ; IC1_L1.1@110.9,155.195 112.4,155.195 ; IC1_L1.1@111.649,155.071 cw(c111.947,154.772) 111.947,155.195 cw(c111.947,155.618) IC1_L1.1@111.649,155.319 ; v2@112.182,154.318 ccw(c111.414,155.086) 112.5,155.086 ccw(c113.586,155.086) v2@112.818,154.318 ; v2(112.5,154) 112.5,155.095 112.4,155.195 ; 112.834,155.195 ccw(c112.834,155.816) C1_L1.1@113.273,155.377 ; 112.859,155.195 cw(c112.859,154.609) C1_L1.1@113.273,155.023 ; C1_L1.1@113.45,155.2 113.445,155.195 112.4,155.195
  Bottom Layer w1: CN4.P5V1@2.68,122.32 ccw(c1.908,123.092) 3,123.092 ccw(c4.092,123.092) CN4.P5V1@3.32,122.32 ; CN4.P5V1@3,122 3,125.8 ; CN4.P5V2@5.22,122.32 ccw(c4.448,123.092) 5.54,123.092 ccw(c6.632,123.092) CN4.P5V2@5.86,122.32 ; CN4.P5V2@5.54,122 5.54,126.56 5.2,126.9 4.1,126.9 ; v2(66.421,154) 66.5,153.921 66.5,147.6 ; 66.5,147.8 66.5,147.6 ; CN1.2@81.33,13.68 cw(c80.558,12.908) 81.65,12.908 cw(c82.742,12.908) CN1.2@81.97,13.68 ; CN1.2@81.65,14 81.65,9.55 83.2,8 108.9,8 111.3,10.4 111.3,39.9 110.4,40.8 104.5,40.8 103,42.3 103,145.4 ; v2(89.521,154) 89.6,153.921 89.6,147.9 ; v1@102.605,137.105 cw(c101.65,136.15) 103,136.15 ; v1@102.605,137.295 ccw(c101.65,138.25) 103,138.25 ; 103,93.691 cw(c104.009,93.691) v1@103.295,94.405 ; 103,95.309 ccw(c104.009,95.309) v1@103.295,94.595 ; 103,114.55 cw(c104.35,114.55) v1@103.395,115.505 ; 103,116.65 ccw(c104.35,116.65) v1@103.395,115.695 ; v2(112.5,154) 112.5,148.7 110.4,146.6 104.2,146.6 ; 3,125.8 4.1,126.9 ; 3,125.8 3,126.9 ; 3,126.9 4.1,126.9 ; 3,126.9 3,128 ; 3,128 4.1,126.9 ; 3,128 3,142.8 4.8,144.6 54.8,144.6 55.9,143.5 63.4,143.5 66.5,146.6 ; 66.5,146.6 66.5,147.6 ; 66.5,146.6 67.5,146.6 ; 66.5,147.6 67.5,146.6 ; 67.5,146.6 88.5,146.6 ; 88.5,146.6 88.5,146.8 89.6,147.9 ; 88.5,146.6 89.6,146.6 ; 89.6,146.6 89.6,147.9 ; 89.6,146.6 90.8,146.6 ; 89.6,147.9 90.8,146.7 90.8,146.6 ; 90.8,146.6 101.8,146.6 ; 101.8,146.6 103,145.4 ; 101.8,146.6 103,146.6 ; 103,145.4 104.2,146.6 ; 103,145.4 103,146.6 ; 103,146.6 104.2,146.6
P24VA: CN2_L1.1 CN2_L2.1 CN2_L3.1 CN3.1 CN4.P24V1 CN4.P24V2 CN6.1 CN7.1 CN8.1 | length 329.3
  Top Layer w1: v2(97.6,140.7) 97.6,141.2 v1(98.5,142.1) 98.5,145 99.7,146.2 110.55,146.2 ; v2@97.7,140.7 cw(c99.149,140.7) v1@98.124,141.724 ; 98.052,141.599 cw(c98.741,141.201) v1@98.535,141.97 ; CN6.1@107.8,99.79 107.91,99.9 110.7,99.9 ; CN7.1@107.8,121.19 107.81,121.2 110.6,121.2 ; CN8.1@107.8,142.59 108.01,142.8 110.6,142.8 ; CN6.1@108.12,99.47 cw(c109.158,98.432) 109.158,99.9 ; CN7.1@108.12,120.87 cw(c108.917,120.073) 108.917,121.2 ; CN7.1@108.12,121.51 ccw(c108.868,122.258) 108.868,121.2 ; CN8.1@108.12,142.27 cw(c109.399,140.991) 109.399,142.8 ; CN3.1@108.2,71.98 110.38,71.98 111.7,73.3 111.7,99.1 ; CN3.1@108.52,71.66 cw(c109.292,70.888) 109.292,71.98 cw(c109.292,73.072) CN3.1@108.52,72.3 ; 111.7,122.5 111.7,122.3 ; CN2_L1.1@114.99,166.947 cw(c114.99,165.855) 115.762,166.628 cw(c116.535,167.4) CN2_L1.1@115.443,167.4 ; CN2_L1.1@114.99,167.4 116.7,165.69 116.7,151.2 111.7,146.2 ; 110.55,146.2 111.7,145.05 ; 110.55,146.2 111.7,146.2 ; 110.6,121.2 111.7,122.3 ; 110.6,121.2 111,121.2 ; 110.6,142.8 111.7,143.9 ; 110.6,142.8 111.7,142.8 ; 110.6,142.8 111.7,141.7 ; 110.7,99.9 111.7,100.9 ; 110.7,99.9 110.9,99.9 ; 110.9,99.9 111.7,99.1 ; 110.9,99.9 111.7,99.9 ; 111,121.2 111.7,120.5 ; 111,121.2 111.7,121.2 ; 111.7,99.1 111.7,99.9 ; 111.7,99.9 111.7,100.9 ; 111.7,100.9 111.7,120.5 ; 111.7,120.5 111.7,121.2 ; 111.7,121.2 111.7,122.3 ; 111.7,122.3 111.7,141.7 ; 111.7,141.7 111.7,142.8 ; 111.7,142.8 111.7,143.9 ; 111.7,143.9 111.7,145.05 ; 111.7,145.05 111.7,146.2
  Bottom Layer w1: CN4.P24V1@12.84,122.32 ccw(c11.971,123.189) 13.2,123.189 ; CN4.P24V1@13.16,122 13.2,122.04 13.2,124.8 ; 13.2,122.996 ccw(c14.156,122.996) CN4.P24V1@13.48,122.32 ; CN4.P24V2@15.38,122.32 ccw(c14.608,123.092) 15.7,123.092 ccw(c16.792,123.092) CN4.P24V2@16.02,122.32 ; CN4.P24V2@15.7,122 15.7,125.3 15.2,125.8 14.2,125.8 ; CN2_L3.1@68.591,167.72 ccw(c67.818,168.492) 68.911,168.492 ccw(c70.003,168.492) CN2_L3.1@69.231,167.72 ; CN2_L3.1@68.911,167.4 68.911,169.511 70.2,170.8 92,170.8 ; CN2_L2.1@91.691,167.72 ccw(c90.944,168.467) 92,168.467 ; 92,168.518 ccw(c93.129,168.518) CN2_L2.1@92.331,167.72 ; CN2_L2.1@92.011,167.4 92,167.411 92,170.8 ; 95.91,140.1 ccw(c95.91,142.39) v2@97.529,140.771 ; v2@97.916,141.016 ccw(c96.832,142.1) v1@98.365,142.1 ; v1(98.5,142.1) 98.5,141.6 v2(97.6,140.7) 97,140.1 15.2,140.1 13.2,138.1 13.2,127 ; CN2_L1.1@114.67,167.72 ccw(c113.898,168.492) 114.99,168.492 ccw(c116.082,168.492) CN2_L1.1@115.31,167.72 ; CN2_L1.1@114.99,167.4 114.99,169.41 113.6,170.8 92,170.8 ; 13.2,124.8 14.2,125.8 ; 13.2,124.8 13.2,125.8 ; 13.2,125.8 14.2,125.8 ; 13.2,125.8 13.2,127 ; 13.2,127 14.2,126 14.2,125.8
REAR_SIG_Q2: IC6.1 R17.2 R18.2 | length 33.1
  Top Layer w0.254: IC6.1@95.65,124.725 95.65,97.95 96.35,97.25 99.9,97.25 R17.2@99.95,97.3 99.95,95.7 R18.2@100,95.65
REMOTE_ACCEL0_INT: CN5.5 IC4.8 | length 27.9
  Top Layer w0.254: IC4.8@92.175,28.775 93.475,28.775 93.9,29.2 ; v1@93.684,29.54 cw(c93.524,29.2) 93.9,29.2 ; v1(93.9,30) 93.9,29.2 ; v1@94.116,29.54 ccw(c94.276,29.2) 93.9,29.2
  Bottom Layer w0.254: v1@93.541,29.641 cw(c92.674,28.774) 93.9,28.774 cw(c95.126,28.774) v1@94.259,29.641 ; v1(93.9,30) 93.9,19.8 96.53,17.17 CN5.5@96.53,14 ; CN5.5@95.946,14.584 ccw(c94.537,15.993) 96.53,15.993 ccw(c98.523,15.993) CN5.5@97.114,14.584 ; CN5.5@96.126,14.404 ccw(c95.15,15.38) 96.53,15.38 ccw(c97.91,15.38) CN5.5@96.934,14.404
REMOTE_ACCEL1_INT: CN5.7 IC4.13 | length 27.5
  Top Layer w0.254: IC4.13@86.625,26.175 83.775,26.175 83.3,25.7 83.3,21.7 84,21 90.2,21 91.45,19.75 CN5.7@91.45,14 ; CN5.7@90.866,14.584 ccw(c89.457,15.993) 91.45,15.993 ccw(c93.443,15.993) CN5.7@92.034,14.584 ; CN5.7@91.046,14.404 ccw(c90.07,15.38) 91.45,15.38 ccw(c92.83,15.38) CN5.7@91.854,14.404
REMOTE_I2C_SCL: CN5.3 IC3.5 IC3.6 | length 25.4
  Top Layer w0.254: CN5.3@101.026,14.584 ccw(c99.617,15.993) 101.61,15.993 ccw(c103.603,15.993) CN5.3@102.194,14.584 ; CN5.3@101.206,14.404 ccw(c100.23,15.38) 101.61,15.38 ccw(c102.99,15.38) CN5.3@102.014,14.404 ; CN5.3@101.61,14 101.61,16.51 103.6,18.5 103.6,27.2 ; IC3.6@101.75,27.135 103.535,27.135 103.6,27.2 ; IC3.5@101.75,28.405 103.295,28.405 103.6,28.1 103.6,27.2 ; IC3.6@102.422,27.013 cw(c102.718,26.717) 102.718,27.135 cw(c102.718,27.553) IC3.6@102.422,27.257 ; IC3.5@102.422,28.283 cw(c102.718,27.987) 102.718,28.405 cw(c102.718,28.823) IC3.5@102.422,28.527
REMOTE_I2C_SDA: CN5.1 IC3.2 IC3.3 | length 24.5
  Top Layer w0.254: CN5.1@106.106,14.584 ccw(c104.697,15.993) 106.69,15.993 ccw(c108.683,15.993) CN5.1@107.274,14.584 ; CN5.1@106.286,14.404 ccw(c105.31,15.38) 106.69,15.38 ccw(c108.07,15.38) CN5.1@107.094,14.404 ; CN5.1@106.69,14 106.69,16.71 105.3,18.1 105.3,25.9 ; IC3.2@106.778,25.743 ccw(c106.482,25.447) 106.482,25.865 ccw(c106.482,26.283) IC3.2@106.778,25.987 ; IC3.3@106.778,27.013 ccw(c106.482,26.717) 106.482,27.135 ccw(c106.482,27.553) IC3.3@106.778,27.257 ; IC3.2@107.45,25.865 105.335,25.865 105.3,25.9 ; IC3.3@107.45,27.135 105.535,27.135 105.3,26.9 105.3,25.9
pads on no net: CN1.3 CN1.4 CN1.6 CN1.7 CN2_L1.6 CN2_L2.6 CN2_L3.6 CN3.5 CN3.6 CN3.7 CN4.A10 CN4.A11 CN4.A12 CN4.A13 CN4.A14 CN4.ID5 CN4.ID6 CN4.ID7 CN4.ID8 CN4.T2 CN4.T5 CN4.T6 CN4.T16 CN4.T17 CN4.T23 CN4.T25 CN4.T26 CN4.T28 CN4.T31 CN4.T32 CN4.T33 CN6.3 CN6.4 CN6.5 CN6.6 CN6.7 CN7.3 CN7.4 CN7.5 CN7.6 CN7.7 CN8.3 CN8.4 CN8.5 CN8.6 CN8.7 FID8_1.1 FID8_1_1.1 FID10_1.1 FID10_1_1.1 IC2.1 IC2.2 IC2.3 IC2.4 IC2.5 IC2.10 IC2.11 IC2.12 IC2.13 IC2.14 IC2.28 IC4.7 IC4.14 IC5.1 IC6.8 IC6.10 IC6.12 SN2.0 SN3.0 SN4.0 SN5.0 SN6.0 TOOLHOLE1_1.TOOL TOOLHOLE1_1_1.TOOL TOOLHOLE5_1.TOOL1 TOOLHOLE5_1_1.TOOL1

## Polygon pours and split planes (outlines as drawn)
DGND on Top Layer "Bottom Layer-No Net" (solid, remove dead copper, pour order 3): 122.1,173.8 121.8,173.5 121.8,2 -2.6,2 -4.3,3.7 -4.3,173.4
DGND on Bottom Layer "Bottom Layer-No Net" (solid, remove dead copper, pour order 4): 122.1,173.8 121.8,173.5 121.8,2 -2.6,2 -4.3,3.7 -4.3,173.4

## Keep-outs
Keep-Out Layer:
  lines w0.5: -3,26 -3,149.695 0.5,149.695 ccw(c0.5,156.848) 7.652,156.848 7.652,167.07 ccw(c-1,170.348) 8.252,170.348 8.252,172.348 121,172.348 121,3.348 8.252,3.348 8.252,5.348 ccw(c-1,5.348) 7.652,8.625 7.652,18.848 ccw(c0.5,18.848) 0.5,26 -3,26

## Other copper
Top Layer:
  text "rLoop - Control Node, Rev 1.0" at 8.5,-1.7 h3

## Silkscreen, mask and mechanical layers (free items; w line width, h text height)
Top Overlay:
  text "LASER 3" at 50,170.6 h2
  text "LASER 2" at 73.1,170.6 h2
  text "LASER 1" at 96.079,170.6 h2
  text "BLU" at 50.82,164 h1.5 r270
  text "BLK" at 53.36,164 h1.5 r270
  text "PNK" at 58.44,164 h1.5 r270
  text "GRY" at 60.98,164 h1.5 r270
  text "YEL" at 63.52,164 h1.5 r270
  text "GRN" at 66.06,164 h1.5 r270
  text "RED" at 68.6,164 h1.5 r270
  text "BLU" at 73.92,164 h1.5 r270
  text "BLK" at 76.46,164 h1.5 r270
  text "PNK" at 81.54,164 h1.5 r270
  text "GRY" at 84.08,164 h1.5 r270
  text "YEL" at 86.62,164 h1.5 r270
  text "GRN" at 89.16,164 h1.5 r270
  text "RED" at 91.7,164 h1.5 r270
  text "BLU" at 96.899,164 h1.5 r270
  text "BLK" at 99.439,164 h1.5 r270
  text "PNK" at 104.519,164 h1.5 r270
  text "GRY" at 107.059,164 h1.5 r270
  text "YEL" at 109.599,164 h1.5 r270
  text "GRN" at 112.139,164 h1.5 r270
  text "RED" at 114.679,164 h1.5 r270
  text "REFLECT SENSOR 1" at 111.9,143.8 h2 r270
  text "REFLECT SENSOR 2" at 111.9,122.4 h2 r270
  text "ID1" at 23.2,117.2 h1.5
  text "ID2" at 23.2,115.2 h1.5
  text "ID3" at 23.2,113.2 h1.5
  text "ID4" at 23.2,111.2 h1.5
  text "REFLECT SENSOR 3" at 111.9,101 h2 r270
  text "LASER DISTANCE" at 112.3,73.19 h2 r270
  text "P24V" at 101.3,71.5 h1.5
  text "DGND" at 101.3,68.96 h1.5
  text "RX" at 101.3,66.42 h1.5
  text "TX" at 101.3,63.88 h1.5
  text "Control Node" at 28.925,18.69 h2
  text "REMOTE ACCEL INTERFACE" at 65.1,17.4 h1.5
  text "Rev. 1.0" at 28.825,16.89 h2
  text "S/N:" at 28.825,12.29 h2
  text "DGND" at 66.22,10.3 h1.5 r270
  text "DGND" at 73.84,10.3 h1.5 r270
  text "P5V" at 81.46,10.3 h1.5 r270
  text "D12V" at 84,10.3 h1.5 r270
  text "DGND" at 88.72,10.3 h1.5 r270
  text "INT1" at 91.26,10.3 h1.5 r270
  text "DGND" at 93.8,10.3 h1.5 r270
  text "INT0" at 96.34,10.3 h1.5 r270
  text "DGND" at 98.88,10.3 h1.5 r270
  text "SCL" at 101.42,10.3 h1.5 r270
  text "DGND" at 103.96,10.3 h1.5 r270
  text "SDA" at 106.5,10.3 h1.5 r270
Mechanical 1:
  lines w0.1: -11,-4 135,-4 135,179.695 -11,179.695 -11,-4
  lines w0.127: -3,26 0.5,26 cw(c0.5,18.848) 7.652,18.848 7.652,8.625 cw(c-1,5.348) 8.252,5.348 8.252,3.348 121,3.348 121,172.348 8.252,172.348 8.252,170.348 cw(c-1,170.348) 7.652,167.07 7.652,156.848 cw(c0.5,156.848) 0.5,149.695 -3,149.695 -3,26
Mechanical 3:
  lines w2.4: -4.2,93.2 -4.2,24.8 0.5,24.8 ; -4.2,99.2 -4.2,150.8 ; -4.2,150.895 0.5,150.895 ; 0.5,24.8 cw(c0.5,18.848) 6.452,18.848 6.452,8.625 ; 0.5,150.896 ccw(c0.5,156.848) 6.452,156.848 6.452,167.27 ; 6.53,8.2 cw(c-1,5.348) 7.052,5.348 7.052,2.148 66.4,2.148 ; 6.53,167.494 ccw(c-1.005,170.349) 7.052,170.349 7.052,173.548 64.552,173.548 ; 70.652,173.548 122.2,173.548 122.2,127.095 ; 72.4,2.148 122.21,2.148 ; 122.2,2.148 122.2,44.295 ; 122.2,51.495 122.2,119.895

## Text inside footprints (layer, text, board x,y; h text height)
LBL1: Top Overlay "rloop.org" at 16.55,13.3 h1
LBL2: Top Overlay "STATIC SENSITIVE" at 28.726,25.504 h2